# Altium PCB Reles.PcbDoc
Units mm, origin at the board's own origin, x right, y up, seen from the top; angles counter-clockwise.
Board outline 137 x 96 mm, 2 copper layers (Top Layer, Bottom Layer); 42 components, 35 nets, 115 pads, 0 vias.
Unrouted connection lines stored in the file: 2.
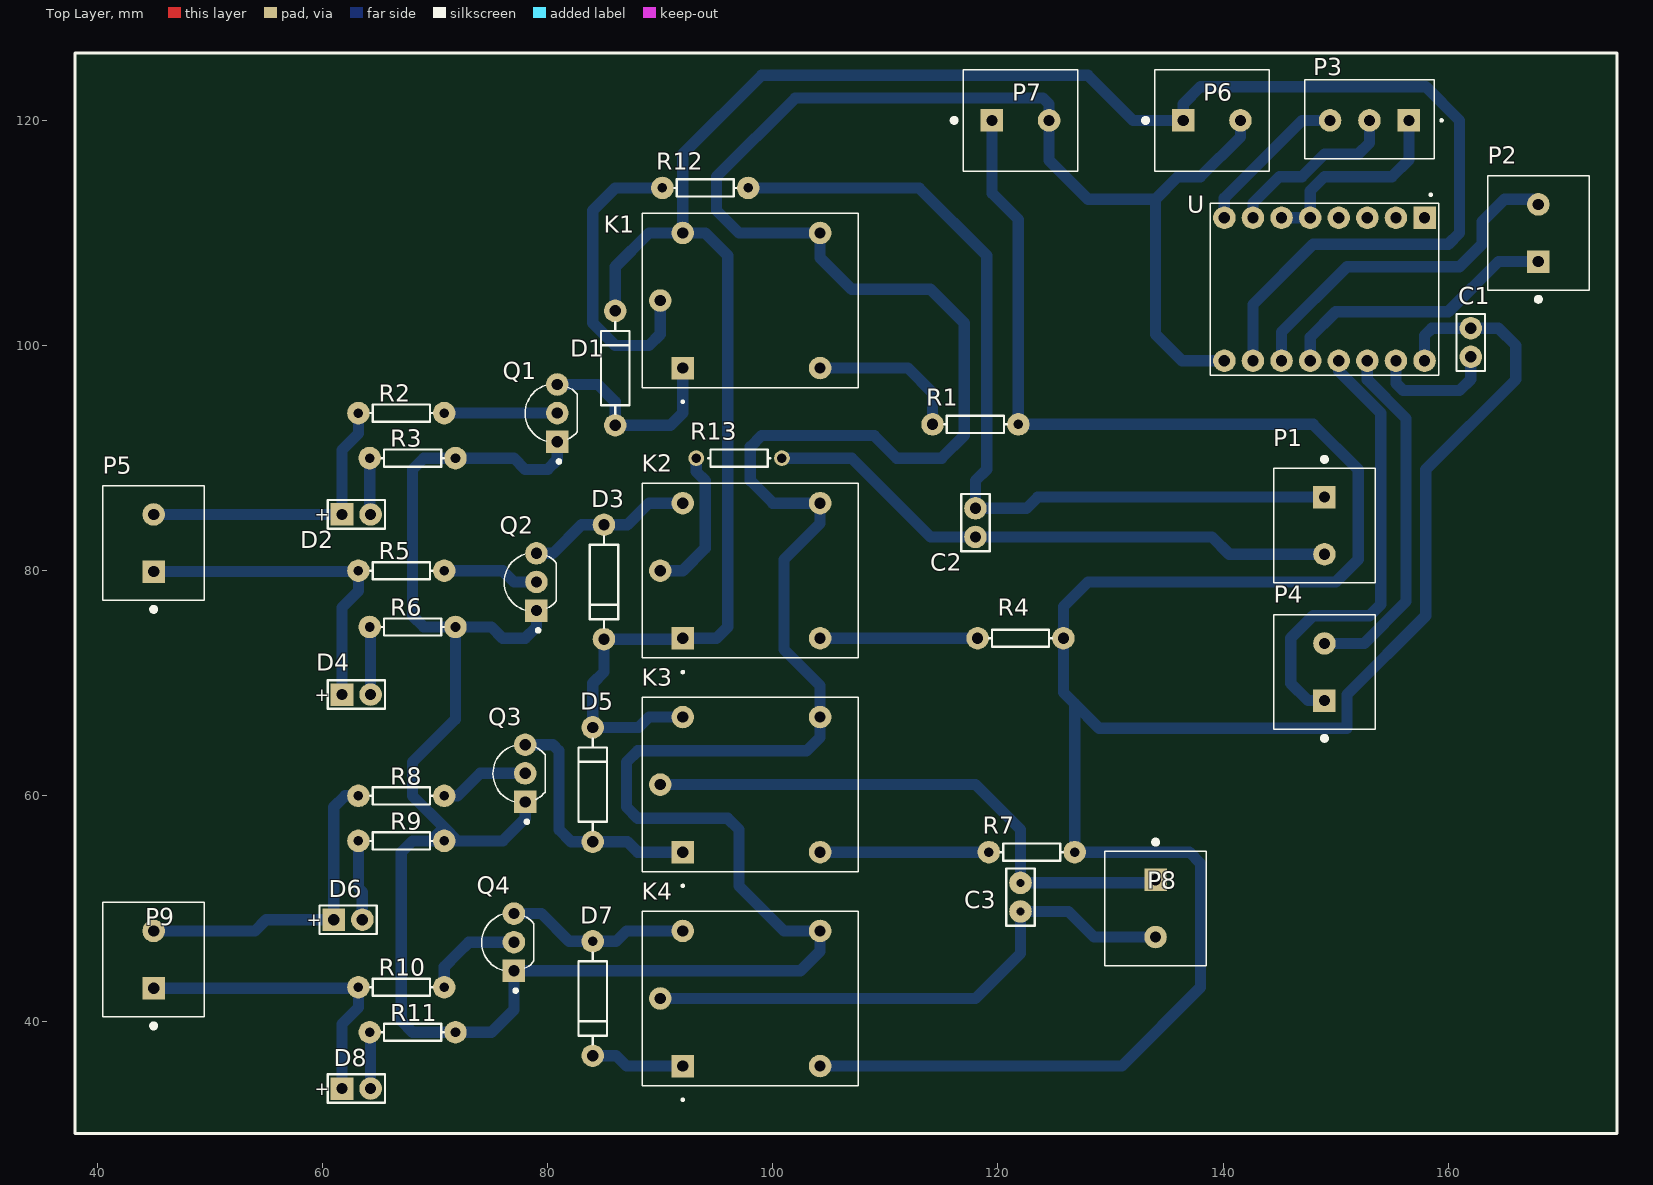
[diagram p0: Top Layer view]
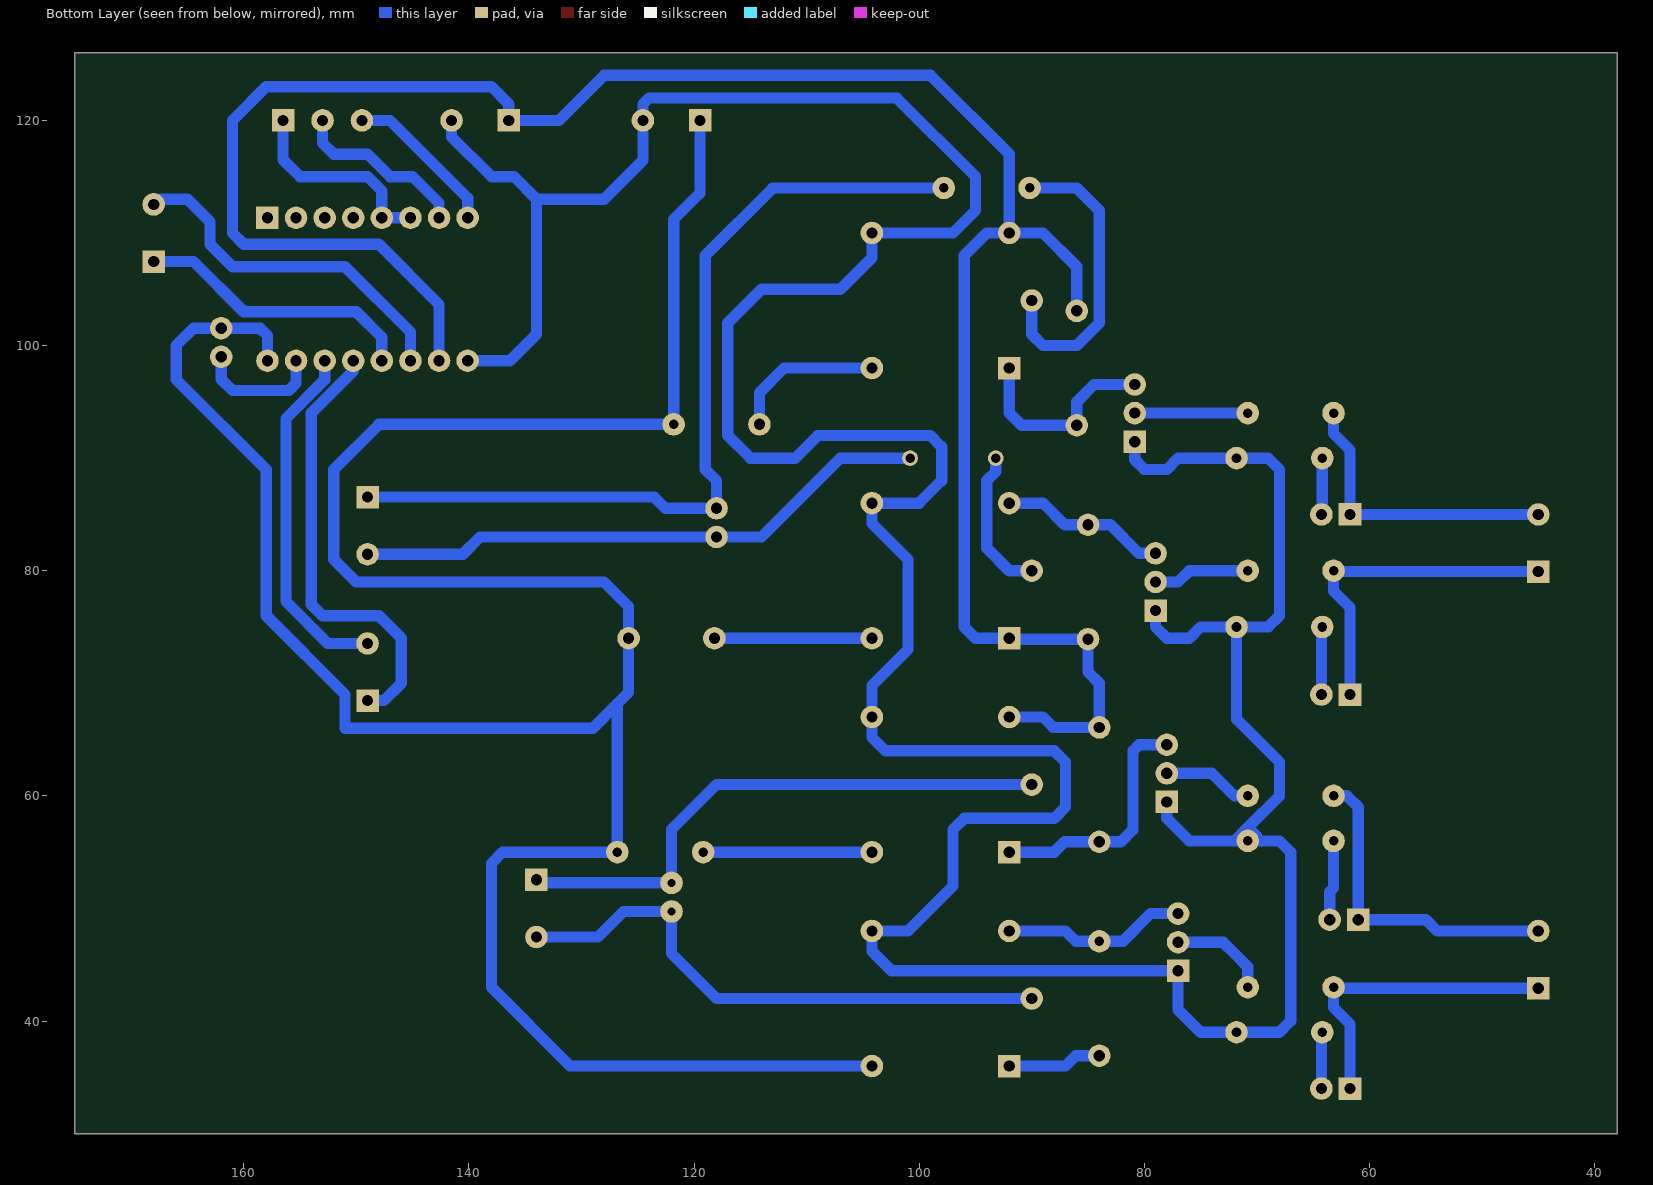
[diagram p1: Bottom Layer view, seen from below]

## Layer stack, top to bottom
Top Solder: solder mask 0.0102, Solder Resist, Dk 3.5
Top Layer: signal copper 0.0356
Dielectric 1: dielectric 0.32, FR-4, Dk 4.8
Bottom Layer: signal copper 0.0356
Bottom Solder: solder mask 0.0102, Solder Resist, Dk 3.5

## Board outline
38,30 175,30 175,126 38,126

## Design rules (kind name [scope] priority, off if disabled: settings)
Clearance [All] p1: gap=0.254 ignorepadtopadclearanceinfootprint=FALSE except(0: Arc-Hole Track-Hole SMDPad-Hole THPad-Hole Via-Hole Fill-Hole Poly-Hole Region-Hole Text-Hole)
PolygonConnect [All] p1: connectstyle=Relief reliefconductorwidth=0.254 reliefentries=4 polygonreliefangle="90 Angle" airgapwidth=0.254
RoutingVias [All] p1: holewidth=0.711 width=1.27 viastyle="Through Hole" minholewidth=0.711 minwidth=1.27 maxholewidth=0.711 maxwidth=1.27
SolderMaskExpansion [All] p1: expansion=0.102
Width [All] p1: maxlimit=1 minlimit=1 preferedwidth=1
30 further rules are at their usual default settings.

## Components (designator, comment, footprint, x,y, rotation, side; value= is the part's Value field where it differs from the comment)
C1 "Cap Pol2" RAD-0.1#1 162,100.27 r270 top value=100uF
C2 "Cap" RAD-0.1#1 118,84.27 r90 top value=1nF
C3 "Cap" RAD-0.1#2 122,51 r90 top value=1nF
D1 "Diode" DIODE-0.4#1 86,98 r90 top
D2 "LED0" BAT-2 63,85 r0 top
D3 "Diode" DIODE-0.4#1 85,79 r270 top
D4 "LED0" BAT-2 63,69 r0 top
D5 "Diode" DIODE-0.4#1 84,61 r90 top
D6 "LED0" BAT-2 62.27,49 r0 top
D7 "Diode" DIODE-0.4#2 84,42 r270 top
D8 "LED0" BAT-2 63,34 r0 top
K1 "1-1721150-0" RELAY_1-1721150-0 98,104 r90 top
K2 "1-1721150-0" RELAY_1-1721150-0 98,80 r90 top
K3 "1-1721150-0" RELAY_1-1721150-0 98,61 r90 top
K4 "1-1721150-0" RELAY_1-1721150-0 98,42 r90 top
P1 "Salida motoreductor A" TE_282841-2 149,84 r270 top
P2 "Salida paso a paso A" TE_282841-2 168,110 r90 top
P3 "Entrada Paso a Paso" TE_1776275-3 156.5,120 r180 top
P4 "Salida paso a paso B" TE_282841-2 149,71 r90 top
P5 "Entrada motoreductor A" TE_282841-2 45,82.46 r90 top
P6 "Entrada 5V" TE_282841-2 139,120 r0 top
P7 "Entrada 12V" TE_282841-2 122,120 r0 top
P8 "Salida motoreductor B" TE_282841-2 134,50 r270 top
P9 "Entrada motoreductor B" TE_282841-2 45,45.46 r90 top
Q1 "Bc337" TO92254P520H877-3 80,94 r90 top
Q2 "Bc337" TO92254P520H877-3 78.147,79 r90 top
Q3 "Bc337" TO92254P520H877-3 77.147,62 r90 top
Q4 "Bc337" TO92254P520H877-3 76.148,47 r90 top
R1 "Res1" AXIAL-0.3#1 118,93 r0 top value=1
R2 "Res1" AXIAL-0.3#2 67,94 r0 top value=330
R3 "Res1" AXIAL-0.3#2 68,90 r180 top value=330
R4 "Res1" AXIAL-0.3#3 122,74 r0 top value=1
R5 "Res1" AXIAL-0.3#2 67,80 r0 top value=330
R6 "Res1" AXIAL-0.3#2 68,75 r180 top value=330
R7 "Res1" AXIAL-0.3#2 123,55 r0 top value=1
R8 "Res1" AXIAL-0.3#2 67,60 r0 top value=330
R9 "Res1" AXIAL-0.3#2 67,56 r180 top value=330
R10 "Res1" AXIAL-0.3#2 67,43 r0 top value=330
R11 "Res1" AXIAL-0.3#2 68,39 r180 top value=330
R12 "Res1" AXIAL-0.3#2 94,114 r0 top value=1
R13 "Res1" AXIAL-0.3#4 97,90 r0 top value=1
U "Driver pololu 4988A paso a paso" MODULE_A4988_STEPPER_MOTOR_DRIVER_CARRIER 149,105 r270 top

## Footprints (in the part's own frame and the unit in brackets; to place one, negate y for a bottom-side part, rotate by r counter-clockwise, add the part's x,y. Pads: shape width x height; smd on the part's side, far side on the other; paste and mask are expansions set on the pad)
AXIAL-0.3#1 [mm] "Axial Device, Thru-Hole; 2 Leads; 0.3 in Pin Spacing"
  round 2 hole 1: 1(-3.81,0)
  round 2 hole 0.85: 2(3.81,0)
  silkscreen extent -2.77,-0.76 2.77,0.76
AXIAL-0.3#2 [mm] "Axial Device, Thru-Hole; 2 Leads; 0.3 in Pin Spacing"
  round 2 hole 0.85: 1(-3.81,0) 2(3.81,0)
  silkscreen extent -2.77,-0.76 2.77,0.76
AXIAL-0.3#3 [mm] "Axial Device, Thru-Hole; 2 Leads; 0.3 in Pin Spacing"
  round 2 hole 1: 1(-3.81,0) 2(3.81,0)
  silkscreen extent -2.77,-0.76 2.77,0.76
AXIAL-0.3#4 [mm] "Axial Device, Thru-Hole; 2 Leads; 0.3 in Pin Spacing"
  round 1.4 hole 0.85: 1(-3.81,0) 2(3.81,0)
  silkscreen extent -2.77,-0.76 2.77,0.76
BAT-2 [mm] "Battery; 2 Leads"
  rect 2x2 hole 1: 1(-1.27,0)
  round 2 hole 1: 2(1.27,0)
  silkscreen extent -2.54,-1.27 2.54,1.27
DIODE-0.4#1 [mm] "Diode, Thru-Hole; 2 Leads; 0.4 in Pin Spacing"
  round 2 hole 1: 1(-5.08,0) 2(5.08,0)
  silkscreen extent -4.06,-1.27 4.06,1.27
DIODE-0.4#2 [mm] "Diode, Thru-Hole; 2 Leads; 0.4 in Pin Spacing"
  round 2 hole 0.85: 1(-5.08,0)
  round 2 hole 1: 2(5.08,0)
  silkscreen extent -4.06,-1.27 4.06,1.27
MODULE_A4988_STEPPER_MOTOR_DRIVER_CARRIER [mm]
  rect 2x2 hole 1: 1(-6.35,8.89)
  round 2 hole 1: 2(-6.35,6.35) 3(-6.35,3.81) 4(-6.35,1.27) 5(-6.35,-1.27) 6(-6.35,-3.81) 7(-6.35,-6.35) 8(-6.35,-8.89) 9(6.35,-8.89) 10(6.35,-6.35) 11(6.35,-3.81) 12(6.35,-1.27) 13(6.35,1.27) 14(6.35,3.81) 15(6.35,6.35) 16(6.35,8.89)
  silkscreen extent -8.5,-10.16 7.62,10.16
RAD-0.1#1 [mm] "Radial Cap, Thru-Hole; 2 Leads; 0.1 in Pin Spacing"
  round 2 hole 1: 1(-1.27,0) 2(1.27,0)
  silkscreen extent -2.54,-1.27 2.54,1.27
RAD-0.1#2 [mm] "Radial Cap, Thru-Hole; 2 Leads; 0.1 in Pin Spacing"
  round 2 hole 0.7: 1(-1.27,0) 2(1.27,0)
  silkscreen extent -2.54,-1.27 2.54,1.27
RELAY_1-1721150-0 [mm]
  rect 2x2 hole 1: 1(-6,6)
  round 2 hole 1: 2(0,8) 3(6,6) 4(6,-6.2) 5(-6,-6.2)
  silkscreen extent -9.1,-9.6 7.75,9.6
TE_282841-2 [mm]
  rect 2x2 hole 1: 1(-2.54,0)
  round 2 hole 1: 2(2.54,0)
  silkscreen extent -6.09,-4.5 5.08,4.5
TE_1776275-3 [mm]
  rect 2x2 hole 1: 1(0,0)
  round 2 hole 1: 2(3.5,0) 3(7,0)
  silkscreen extent -3,-3.6 9.25,3.4
TO92254P520H877-3 [mm]
  rect 2x2 hole 1: 1(-2.54,-0.853)
  round 2 hole 1: 2(0,-0.853) 3(2.54,-0.853)
  silkscreen extent -4.44,-2.62 2.47,2.01

## Part data
C1: "Polarized Capacitor (Axial)", LatestRevisionDate=17-Jul-2002, LatestRevisionNote="Re-released for DXP Platform.", PackageDescription="Polarized Capacitor; 2 Leads", PackageReference=POLAR0.8, Published=8-Jun-2000, Publisher="Altium Limited"
C2 C3: "Capacitor", LatestRevisionDate=17-Jul-2002, LatestRevisionNote="Re-released for DXP Platform.", PackageDescription="Radial Cap, Thru-Hole; 2 Leads; 0.3 in Pin Spacing", PackageReference=RAD-0.3, Published=8-Jun-2000, Publisher="Altium Limited"
D1 D3 D5 D7: "Default Diode", Code_JEDEC=DO-214-AB, LatestRevisionDate=17-Jul-2002, LatestRevisionNote="Re-released for DXP Platform.", PackageDescription="DO-214-AB/SMC; 2 C-Bend Leads; Body 7.9 x 5.9 mm, inc. leads (LxW)", PackageReference=SMC, PackageVersion=Sep-1996, Published=8-Jun-2000, Publisher="Altium Limited"
D2 D4 D6 D8: "Typical INFRARED GaAs LED", LatestRevisionDate=08-Jul-2005, LatestRevisionNote="Mech Layer 1 removed.", PackageDescription="LED; 2 Leads", PackageReference=LED-0, Published=8-Jun-2000, Publisher="Altium Limited"
K1 K2 K3 K4: "General Purpose Relay SPDT (1 Form C) 5VDC Coil Through Hole", Package=None, Availability=Unavailable, Comment_1=Rele, EU_RoHS_Compliance=Compliant, MF="TE Connectivity", MP=1-1721150-0, Price=None, SnapEDA_Link=https://www.snapeda.com/parts/1-1721150-0/TE%20Connectivity%20Potter%20&%20Brumfield%20Relays/view-part/735210/?ref=snap
P1 P2 P4 P5 P6 P7 P8 P9: library part MHDR1X2, "Header, 2-Pin", LatestRevisionDate=17-Jul-2002, LatestRevisionNote="Re-released for DXP Platform.", Publisher="Altium Limited"
P3: library part MHDR1X3, "Header, 3-Pin", LatestRevisionDate=17-Jul-2002, LatestRevisionNote="Re-released for DXP Platform.", Publisher="Altium Limited"
Q1 Q2 Q3 Q4: library part 2N3904, "NPN General Purpose Amplifier", ComponentLink1Description="Manufacturer Link", ComponentLink1URL=http://www.fairchildsemi.com/, ComponentLink2Description=Datasheet, ComponentLink2URL=http://www.fairchildsemi.com/ds/2N%2F2N3904.pdf, DatasheetVersion=1997, LatestRevisionDate=15-Jan-2003, LatestRevisionNote="PCB Footprint 'BCY-W3/D4.7' replaced", PackageDescription="TO, Flat Index; 3 In-Line, Axial Leads; Body Dia. 4.5mm; Leads 0.51 x 0.48 mm (max)", PackageReference=TO-92A, PackageVersion=Sep-1998, Published=8-Jun-2000, Publisher="Altium Limited"
R1 R2 R3 R4 R5 R6 R7 R8 R9 R10 R11 R12 R13: "Resistor", LatestRevisionDate=17-Jul-2002, LatestRevisionNote="Re-released for DXP Platform.", PackageDescription="Axial Device, Thru-Hole; 2 Leads; 0.3 in Pin Spacing", PackageReference=AXIAL-0.3, Published=8-Jun-2000, Publisher="Altium Limited"
U: library part A4988_STEPPER_MOTOR_DRIVER_CARRIER, "Stepper Motor Driver", Package=None, Availability=Unavailable, MF=Pololu, MP="A4988 STEPPER MOTOR DRIVER CARRIER", Price=None, SnapEDA_Link=https://www.snapeda.com/parts/A4988%20STEPPER%20MOTOR%20DRIVER%20CARRIER/Pololu/view-part/1499394/?ref=snap

## Nets (pads, with @x,y where several pads share a name; then routed paths per layer and width w, separated by ;. In a path a pad name is that pad's centre, name@x,y a point inside that pad or via, vN(x,y) a via of type N, cw(c..) or ccw(c..) an arc to the next point about the centre after c; other vN are vias at no path point)
+5V: D1.2 D3.2 D5.2 D7.2 K1.3 K2.1 K3.3 K4.1 P6.1 U.10 | length 205.3
  Bottom Layer w1: D7.2 86.08,36.92 87,36 K4.1 ; D1.2 86,107 89,110 K1.3 ; K3.3 89,67 88.08,66.08 D5.2 84,70 85,71 D3.2 91.92,73.92 K2.1 95,74 96,75 96,108 94,110 K1.3 ; U.10 142.65,103.65 148,109 160,109 161,110 161,120 158,123 138,123 136.46,121.46 P6.1 132,120 128,124 99,124 92,117 K1.3
+12V: C1.1 K4.5 P7.1 R1.2 R4.2 R7.2 U.16 | length 253.8
  Bottom Layer w1: K4.5 131,36 138,43 138,54 137,55 R7.2 126.81,68.19 ; P7.1 119.46,113.54 121.81,111.19 R1.2 148,93 152,89 152,81 150,79 128,79 125.81,76.81 R4.2 125.81,69.19 126.81,68.19 ; U.16 157.89,100.89 158.54,101.54 C1.1 164.46,101.54 166,100 166,97 158,89 158,76 151,69 151,66 129,66 126.81,68.19
GND: C1.2 K1.4 K2.4 K3.4 K4.4 P6.2 P7.2 Q1.1 Q2.1 Q3.1 Q4.1 R3.1 R6.1 R9.1 R11.1 U.9 U.15 | length 370.5
  Bottom Layer w1: R9.1 72,56 ; R6.1 71.81,66.81 68,63 68,60 70.81,57.19 ; Q3.1 78,58 76,56 72,56 ; Q2.1 79,75 78,74 76,74 75,75 69,75 68,76 68,89 69,90 R3.1 77,90 78,89 80,89 80.853,89.852 Q1.1 ; U.9 136.35,98.65 134,101 134,113 ; P6.2 141.54,118.54 138,115 136,115 134,113 ; U.15 155.35,96.65 156,96 161,96 162,97 C1.2 ; 70.81,57.19 72,56 ; 70.81,57.19 70,56.38 70,56 68,56 67,55 67,40 68,39 70.81,39 75,39 77,41 Q4.1 102.46,44.46 104.2,46.2 K4.4 101,48 97,52 97,57 96,58 88,58 87,59 87,63 88,64 103,64 104.2,65.2 K3.4 104.2,69.8 101,73 101,81 104.2,84.2 K2.4 100,86 98,88 98,91 99,92 109,92 111,90 115,90 117,92 117,102 114,105 107,105 104.2,107.8 K1.4 97,110 95,112 95,115 102,122 124,122 124.54,121.46 P7.2 124.54,116.46 128,113 134,113
NetC2_1: C2.1 P1.2 R13.2 | length 51.7
  Bottom Layer w1: R13.2 107,90 114,83 C2.1 139,83 140.54,81.46 P1.2
NetC2_2: C2.2 P1.1 R12.2 | length 78
  Bottom Layer w1: R12.2 113,114 119,108 119,89 118,88 C2.2 122.54,85.54 123.54,86.54 P1.1
NetC3_1: C3.1 K4.2 P8.2 | length 50.3
  Bottom Layer w1: K4.2 118,42 122,46 C3.1 126.27,49.73 128.54,47.46 P8.2
NetC3_2: C3.2 K3.2 P8.1 | length 50.5
  Bottom Layer w1: K3.2 118,61 122,57 C3.2 133.73,52.27 P8.1
NetD1_1: D1.1 K1.1 Q1.3 | length 18.3
  Bottom Layer w1: Q1.3 84.46,96.54 86,95 D1.1 90.92,92.92 92,94 K1.1
NetD2_1: D2.1 P5.2 R2.1 | length 26.3
  Bottom Layer w1: P5.2 D2.1 61.73,90.73 63.19,92.19 R2.1
NetD2_2: D2.2 R3.2 | length 5
  Bottom Layer w1: R3.2 64.19,85.08 D2.2
NetD3_1: D3.1 K2.3 Q2.3 | length 14.8
  Bottom Layer w1: Q2.3 80.46,81.54 83,84.08 D3.1 87.08,84.08 89,86 K2.3
NetD4_1: D4.1 P5.1 R5.1 | length 29.8
  Bottom Layer w1: P5.1 63.11,79.92 R5.1 63.19,78.19 61.73,76.73 D4.1
NetD4_2: D4.2 R6.2 | length 6
  Bottom Layer w1: R6.2 64.27,74.92 D4.2
NetD5_1: D5.1 K3.1 Q3.3 | length 22.1
  Bottom Layer w1: Q3.3 80.46,64.54 81,64 81,57 82.08,55.92 D5.1 87.08,55.92 88,55 K3.1
NetD6_1: D6.1 P9.2 R8.1 | length 29
  Bottom Layer w1: P9.2 54,48 55,49 D6.1 61,59 62,60 R8.1
NetD6_2: D6.2 R9.2 | length 7.1
  Bottom Layer w1: R9.2 63.19,51.81 63.54,51.46 D6.2
NetD7_1: D7.1 K4.3 Q4.3 | length 16.4
  Bottom Layer w1: Q4.3 79.46,49.54 81.92,47.08 D7.1 86.08,47.08 87,48 K4.3
NetD8_1: D8.1 P9.1 R10.1 | length 27.8
  Bottom Layer w1: P9.1 63.11,42.92 R10.1 63.19,41.19 61.73,39.73 D8.1
NetD8_2: D8.2 R11.2 | length 5
  Bottom Layer w1: R11.2 64.27,38.92 D8.2
NetK1_2: K1.2 R12.1 | length 27.3
  Bottom Layer w1: K1.2 90,101 89,100 86,100 84,102 84,112 86,114 R12.1
NetK1_5: K1.5 R1.1 | length 13.7
  Bottom Layer w1: K1.5 112,98 114.19,95.81 R1.1
NetK2_2: K2.2 R13.1 | length 13.2
  Bottom Layer w1: K2.2 92,80 94,82 94,88 93.19,88.81 R13.1
NetK2_5: K2.5 R4.1 | length 14
  Bottom Layer w1: K2.5 R4.1
NetK3_5: K3.5 R7.1 | length 15
  Bottom Layer w1: K3.5 R7.1
NetP2_1: P2.1 U.12 | length 25.1
  Bottom Layer w1: U.12 147.73,100.73 150,103 160,103 164.46,107.46 P2.1
NetP2_2: P2.2 U.11 | length 31.6
  Bottom Layer w1: U.11 145.19,101.19 151,107 161,107 163,109 163,111 165,113 167.54,113 P2.2
NetP3_1: P3.1 U.5 U.6 | length 18.3
  Bottom Layer w1: U.6 U.5 147.73,113.73 149,115 155,115 156.5,116.5 P3.1
NetP3_2: P3.2 U.7 | length 15.9
  Bottom Layer w1: U.7 142.65,112.65 145,115 147,115 149,117 152,117 153,118 P3.2
NetP3_3: P3.3 U.8 | length 14
  Bottom Layer w1: U.8 140.11,113.11 147,120 P3.3
NetP4_1: P4.1 U.13 | length 40.1
  Bottom Layer w1: P4.1 147.54,68.46 146,70 146,74 148,76 153,76 154,77 154,94 150.27,97.73 U.13
NetP4_2: P4.2 U.14 | length 31.6
  Bottom Layer w1: P4.2 152.54,73.54 156.254,77.254 156.254,93.519 152.81,96.963 U.14
NetQ1_2: Q1.2 R2.2 | length 10
  Bottom Layer w1: R2.2 Q1.2
NetQ2_2: Q2.2 R5.2 | length 8.6
  Bottom Layer w1: R5.2 76,80 77,79 Q2.2
NetQ3_2: Q3.2 R8.2 | length 8
  Bottom Layer w1: R8.2 72,60 74,62 Q3.2
NetQ4_2: Q4.2 R10.2 | length 8.9
  Bottom Layer w1: R10.2 70.81,44.81 72,46 73,47 Q4.2
pads on no net: U.1 U.2 U.3 U.4

## Silkscreen, mask and mechanical layers (free items; w line width, h text height)
Top Overlay:
  the board outline again, w0.254

## Text inside footprints (layer, text, board x,y; h text height)
D2: Top Overlay "+" at 59.33,84.423 h1.15
D4: Top Overlay "+" at 59.33,68.423 h1.15
D6: Top Overlay "+" at 58.6,48.423 h1.15
D8: Top Overlay "+" at 59.33,33.423 h1.15